# Altium PCB 4 Layer PCB template.PcbDoc
Units mm, origin at the board's own origin, x right, y up, seen from the top; angles counter-clockwise.
Board outline 100 x 100 mm, 4 copper layers (Top, Plane 1, Plane 2, Bottom), stack 1.506 mm thick; 2 components, 0 nets, 4 pads, 0 vias.
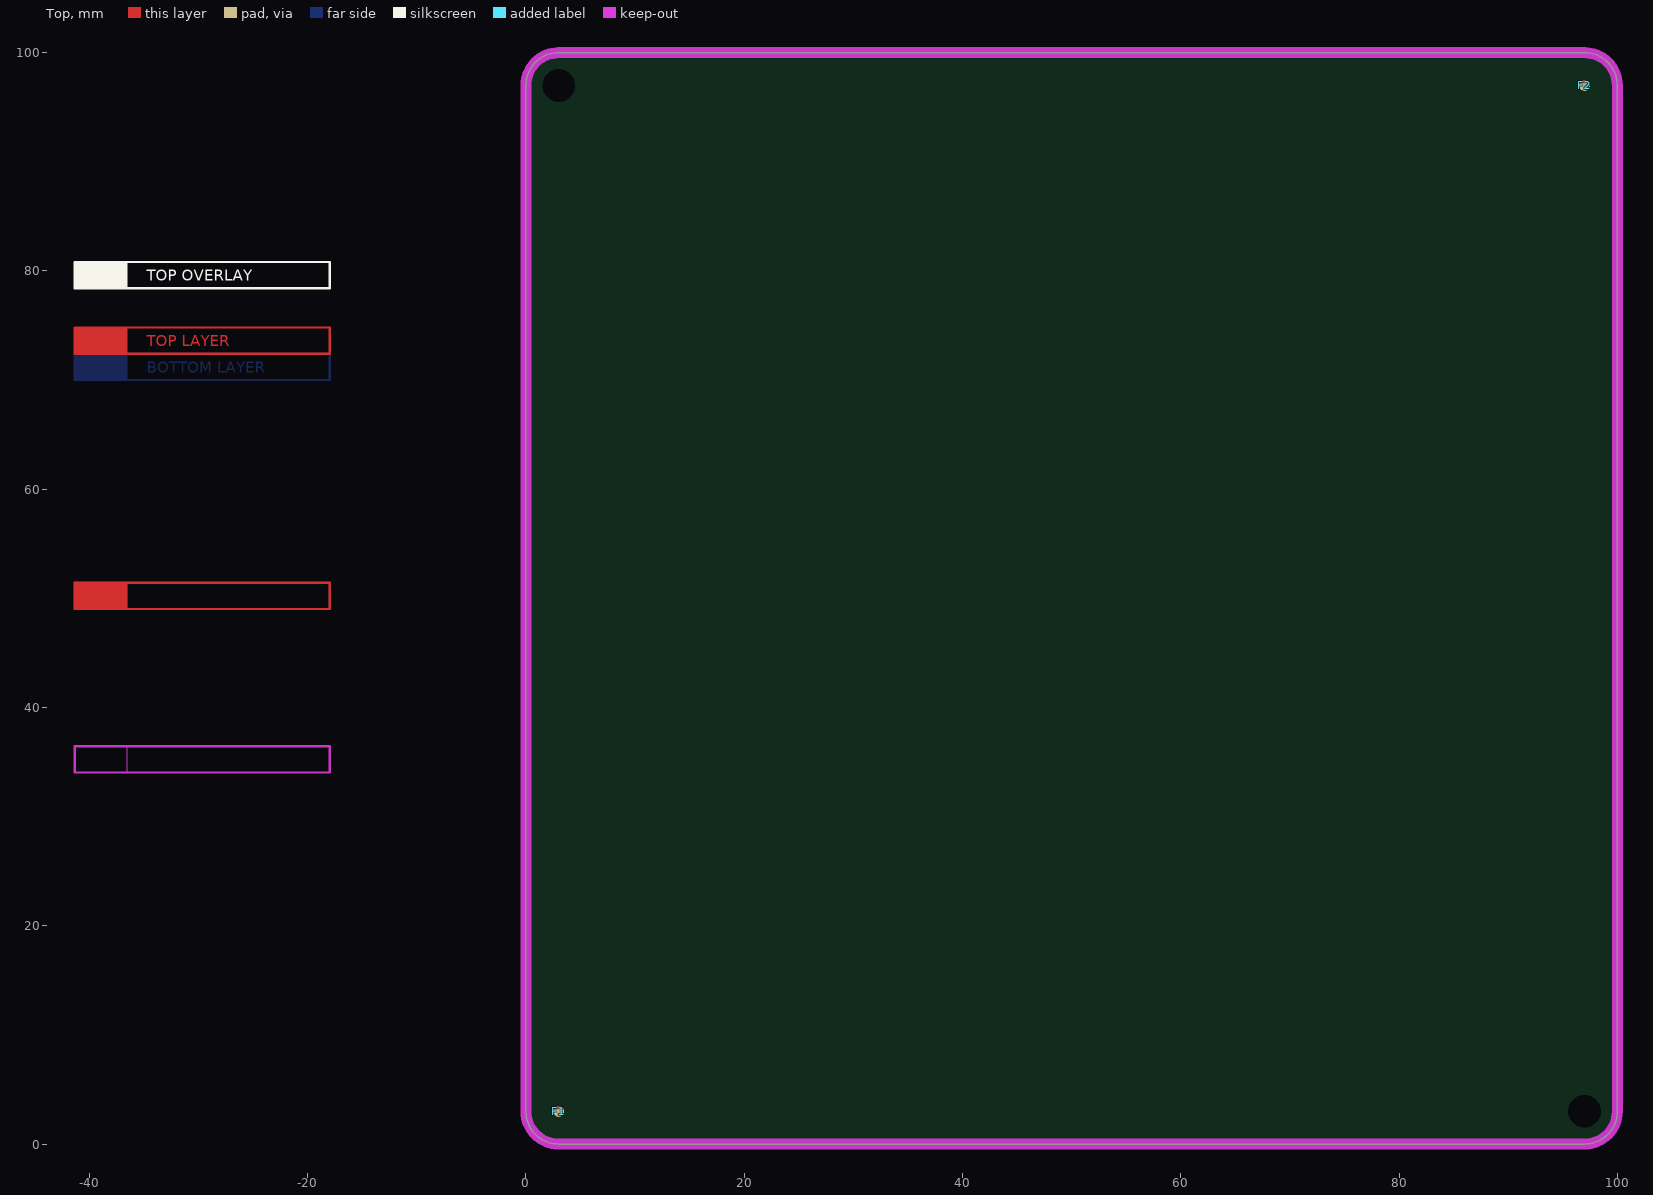
[diagram p0: Top view]
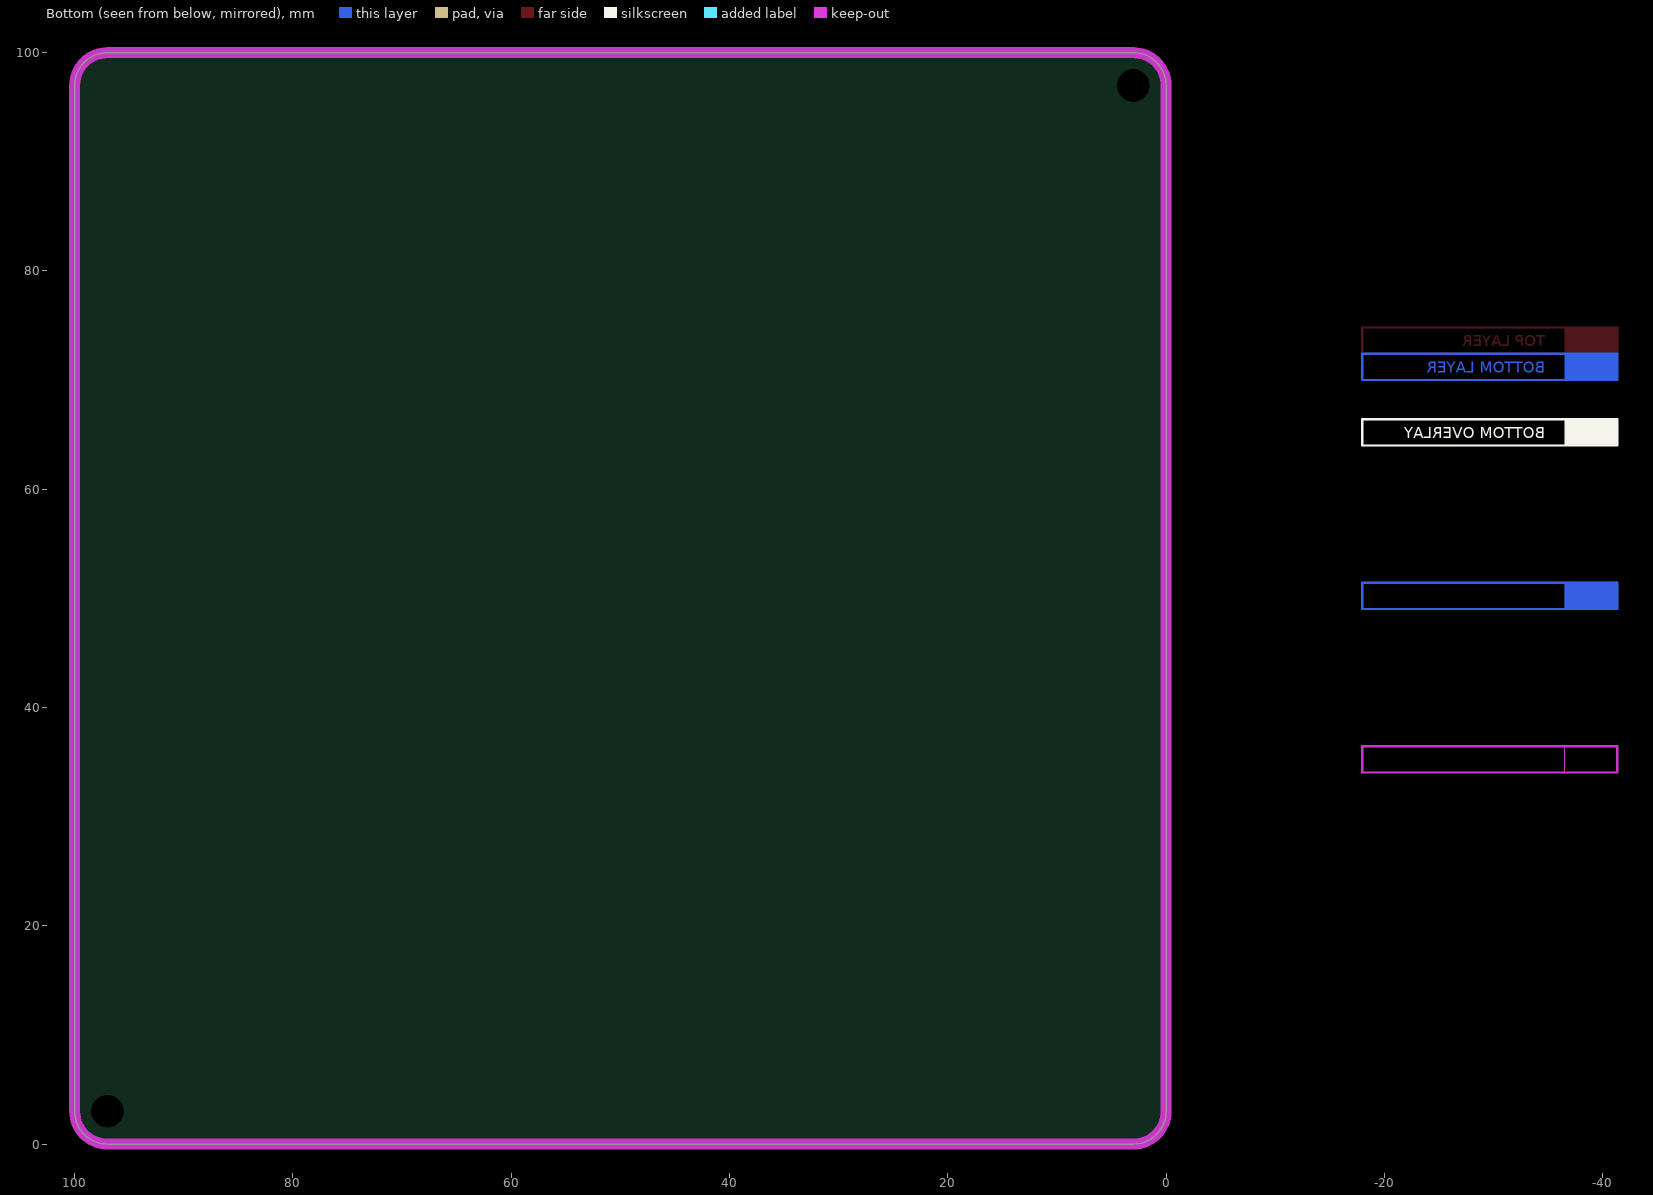
[diagram p1: Bottom view, seen from below]
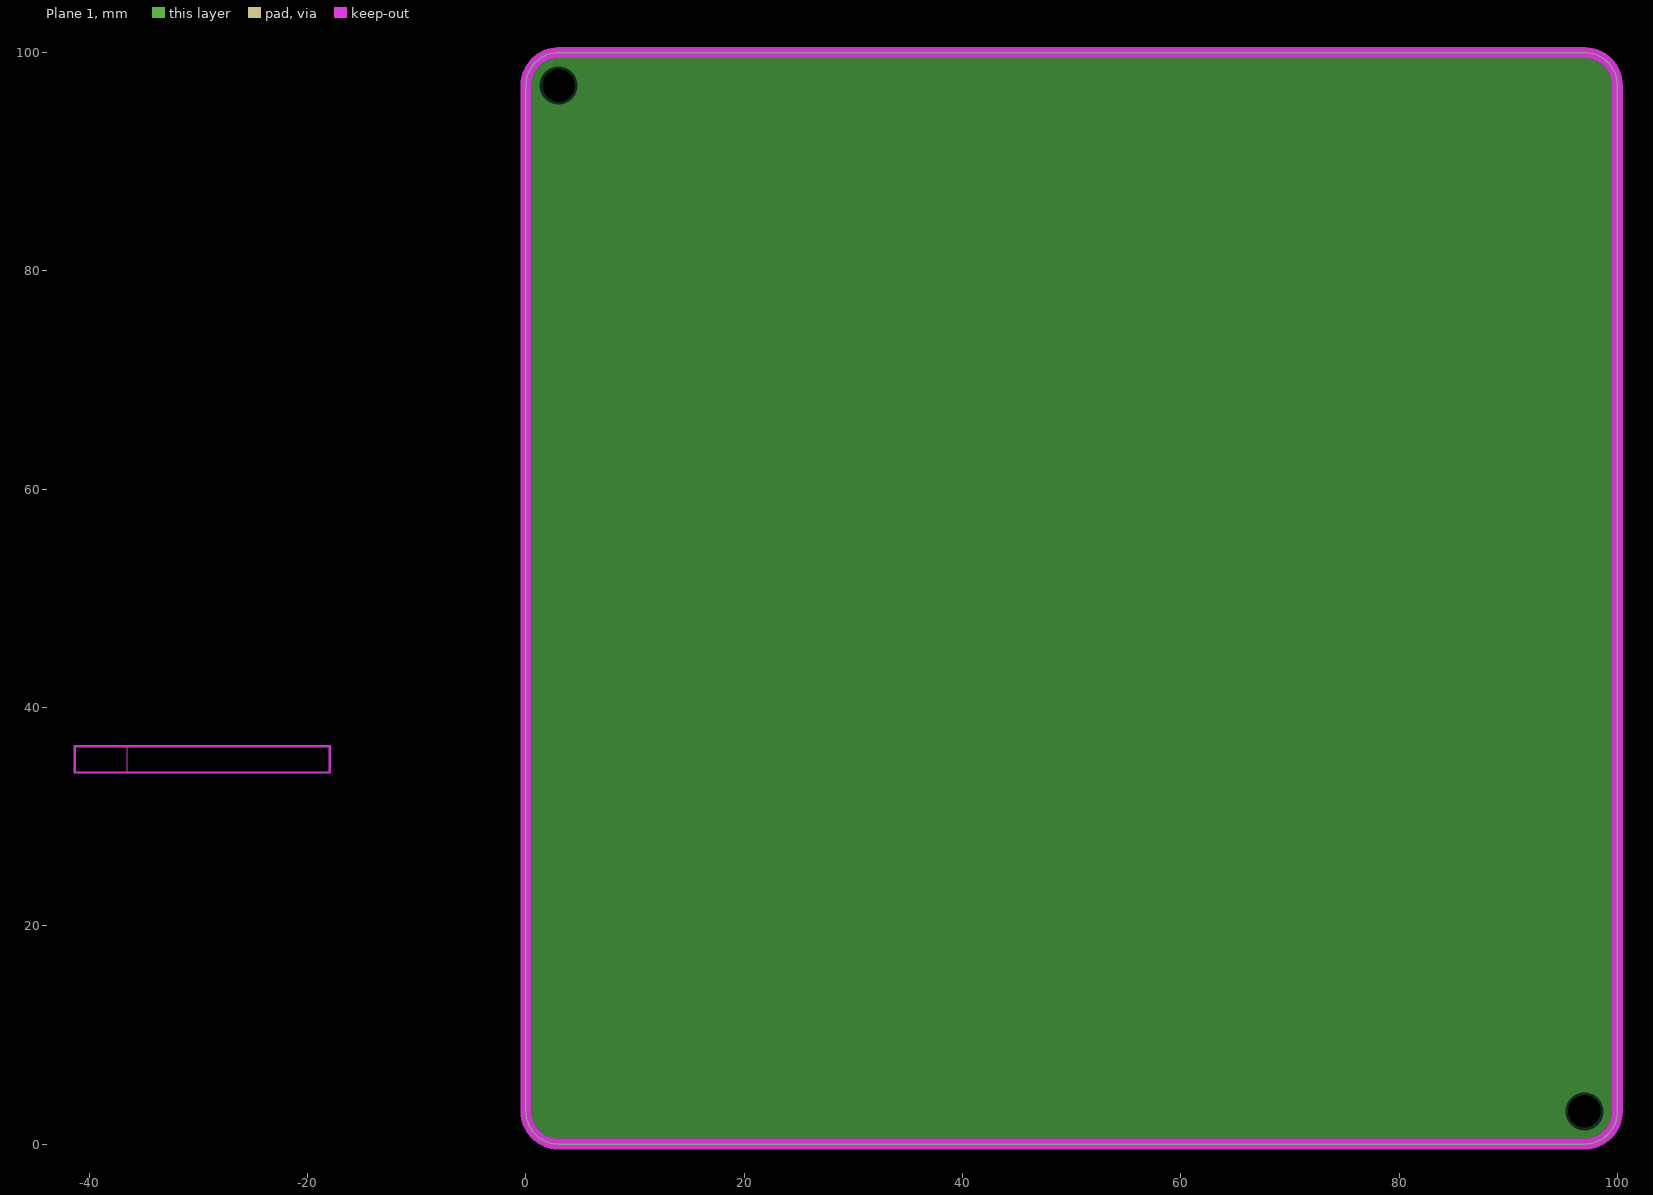
[diagram p2: Plane 1, clearances drawn from the general rule]
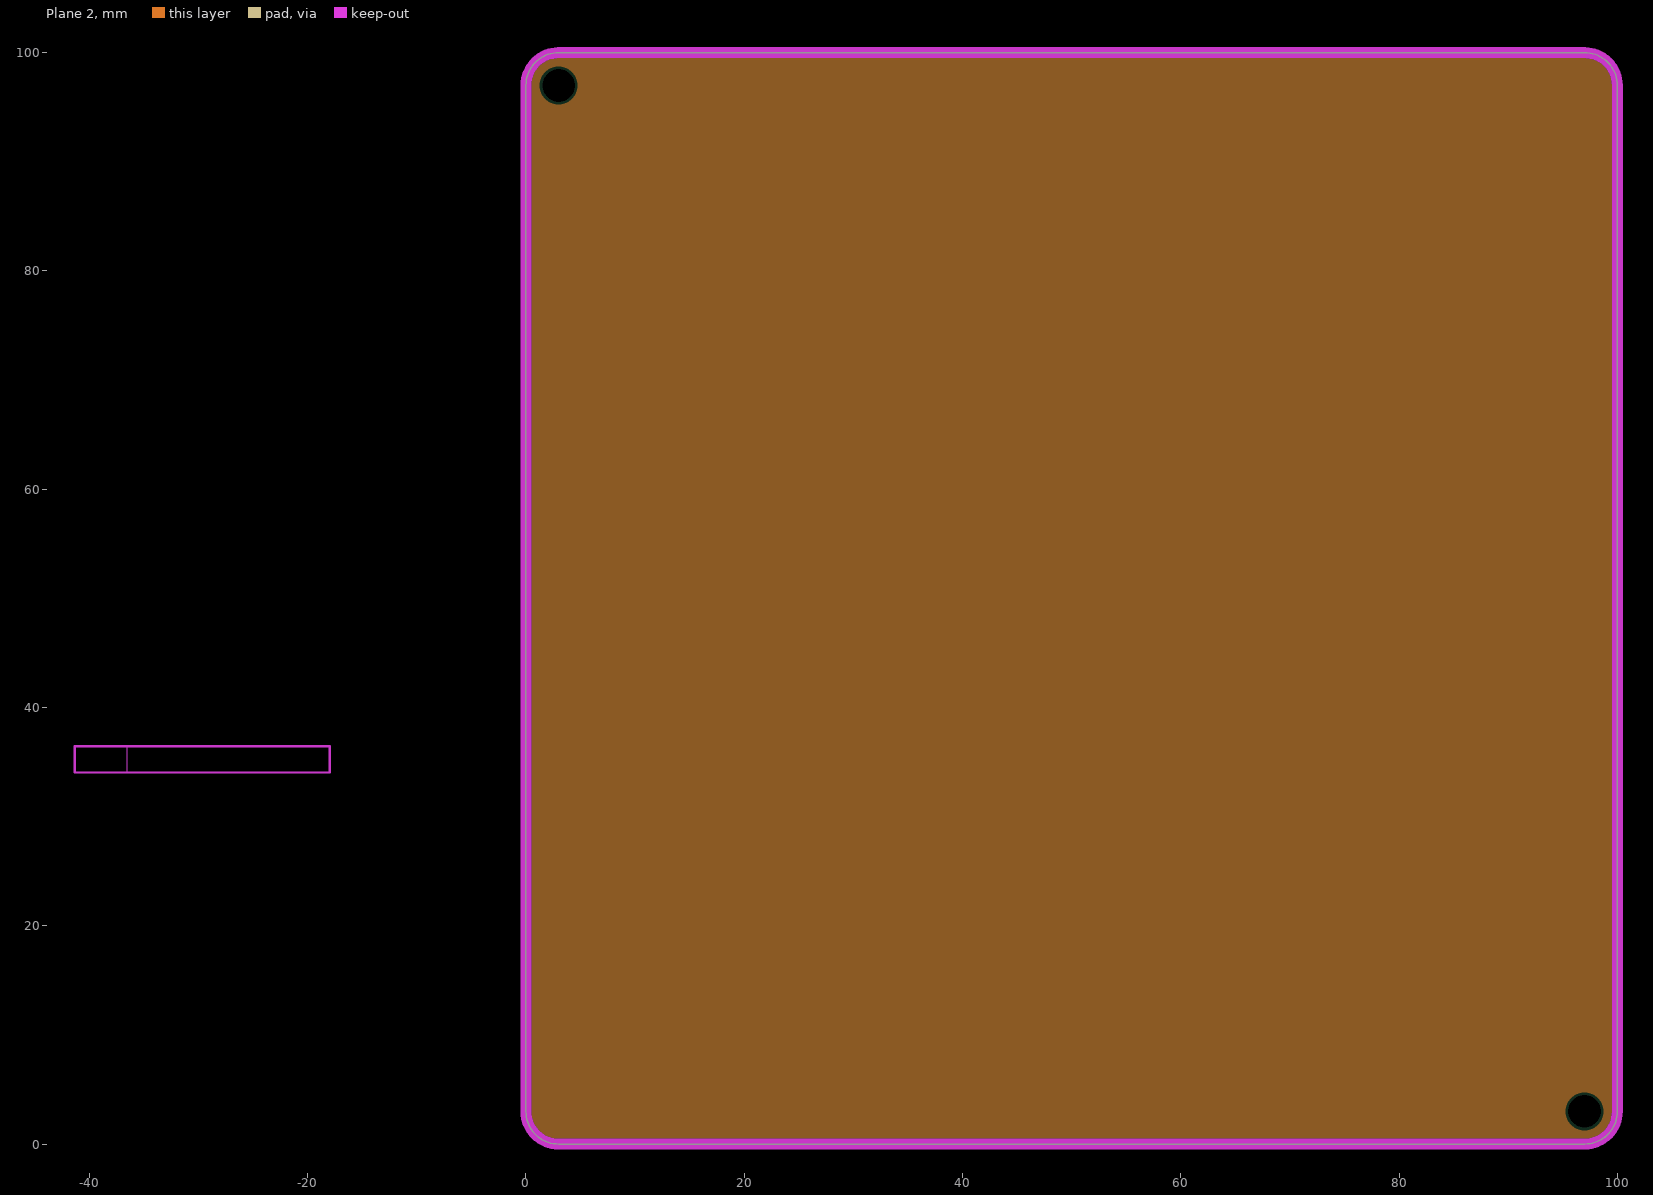
[diagram p3: Plane 2, clearances drawn from the general rule]

## Layer stack, top to bottom
Top: signal copper 0.035
Dielectric: core 0.2, FR-4, Dk 4.58
Plane 1: plane copper 0.018
Dielectric: prepreg 1, FR-4, Dk 4.58
Plane 2: plane copper 0.018
Dielectric: core 0.2, FR-4, Dk 4.58
Bottom: signal copper 0.035

## Board outline
0,3 0,97 cw(c3,97) 3,100 97,100 cw(c97,97) 100,97 100,3 cw(c97,3) 97,0 3,0 cw(c3,3)

## Design rules (kind name [scope] priority, off if disabled: settings)
AssemblyTestPointUsage [All] p1 off:
AssemblyTestpoint [All] p1 off: testpointundercomponent=TRUE minsize=1.016 maxsize=2.54 preferedsize=1.524 minholesize=0 maxholesize=1.016 preferedholesize=0.813 testpointgrid=0.025 usegrid=TRUE gridtolerance=0 allowsidetop=TRUE allowsidebottom=TRUE
Clearance ClearanceViaPad [IsVia vs IsPad] p1: gap=0.1
Clearance ClearanceGNDpolygons [InPolygonClass('GNDpolygons')] p2: gap=0.3
Clearance ClearanceTechnology [All] p3: gap=0.2
FabricationTestPointUsage [All] p1 off: valid=0 allowmultiple=FALSE
FabricationTestpoint [All] p1 off: side=3 testpointundercomponent=TRUE minsize=1.016 maxsize=2.54 preferedsize=1.524 minholesize=0 maxholesize=1.016 preferedholesize=0.813 testpointgrid=0.025 allowsidetop=TRUE allowsidebottom=TRUE usegrid=TRUE gridtolerance=0
HoleSize [All] p1: absolutevalues=TRUE maxlimit=6.3 minlimit=0.3 maxpercent=80.000 minpercent=20.000
HoleToHoleClearance [All] p1: gap=0.3 allowstackedmicrovias=TRUE
MinimumAnnularRing [All] p1: minimumring=0.2
MinimumSolderMaskSliver [All] p1: minsoldermaskwidth=0
PlaneClearance [All] p1: clearance=0.25
PlaneConnect [All] p1: planeconnectstyle=Relief reliefexpansion=0.508 reliefentries=4 reliefconductorwidth=0.254 reliefairgap=0.254
PolygonConnect PolygonConnectVia [IsVia] p1: connectstyle=Direct reliefconductorwidth=0.4 reliefentries=4 polygonreliefangle="90 Angle" airgapwidth=0.254
PolygonConnect PolygonConnectBigPads [(ObjectKind = 'Pad') And ((AsMM(PadXSize_AllLayers) > 2) Or (AsMM(PadYSize_AllLayers) > 2))] p2: connectstyle=Direct reliefconductorwidth=0.4 reliefentries=4 polygonreliefangle="90 Angle" airgapwidth=0.254
PolygonConnect PolygonConnectGeneral [All] p3: connectstyle=Relief reliefconductorwidth=0.3 reliefentries=4 polygonreliefangle="90 Angle" airgapwidth=0.2
RoutingVias [All] p1: holewidth=0.6 width=1.2 viastyle="Through Hole" minholewidth=0.3 minwidth=0.7 maxholewidth=0.9 maxwidth=1.4
SilkToSilkClearance [All] p1: silktosilkclearance=0.15
SilkToSolderMaskClearance SilkscreenOverComponentPads [IsPad] p1: minsilkscreentomaskgap=0.1 clearancetoexposedcopper=FALSE
SolderMaskExpansion [All] p1: expansion=0.1
Width WidthTechnology [All] p1: maxlimit=3 minlimit=0.16 preferedwidth=0.6 minimp=50.000000 maximp=50.000000 favimp=50.000000
17 further rules are at their usual default settings.

## Classes and differential pairs
channel class "Row driver": "U_Row driver 1" "U_Row driver 2" "U_Row driver 3" "U_Row driver 4" "U_Row driver 5" "U_Row driver 6" "U_Row driver 7" "U_Row driver 8"
channel class "Column driver": "U_Column driver 1" "U_Column driver 2" "U_Column driver 3" "U_Column driver 4"

## Components (designator, comment, footprint, x,y, rotation, side; value= is the part's Value field where it differs from the comment)
F1 "Fiducial" FIDUCIAL 3,3 r90 top locked
F2 "Fiducial" FIDUCIAL 97,97 r90 top locked

## Footprints (in the part's own frame and the unit in brackets; to place one, negate y for a bottom-side part, rotate by r counter-clockwise, add the part's x,y. Pads: shape width x height; smd on the part's side, far side on the other; paste and mask are expansions set on the pad)
FIDUCIAL [mm] "Fiducial"
  round 1 smd paste-1 mask+0.5: ""(0,0)
  body extent -0.49,-0.5 0.5,0.5, height 0.5

## Free pads (board coordinates)
  round 1 hole 3: 0(3,97) 0(97,3)

## Nets (pads, with @x,y where several pads share a name; then routed paths per layer and width w, separated by ;. In a path a pad name is that pad's centre, name@x,y a point inside that pad or via, vN(x,y) a via of type N, cw(c..) or ccw(c..) an arc to the next point about the centre after c; other vN are vias at no path point)
pads on no net: F1. F2.
copper on no net: | length 103.1
  Top w0.2: -41.342,72.414 -17.974,72.414 -17.974,74.827 -41.342,74.827 -41.342,72.414
  Bottom w0.2: -41.342,70.001 -17.974,70.001 -17.974,72.414 -41.342,72.414 -41.342,70.001

## Polygon pours and split planes (outlines as drawn)
no net on Plane 1 (split plane): 97.218,99.49 97.434,99.462 97.647,99.415 97.855,99.349 98.056,99.266 98.25,99.165 98.434,99.048 98.607,98.915 98.768,98.768 98.915,98.607 99.048,98.434 99.165,98.25 99.266,98.056 99.349,97.855 99.415,97.647 99.462,97.434 99.49,97.218 99.499,97.016 99.498,97 99.498,3 99.499,2.984 99.49,2.782 99.462,2.566 99.415,2.353 99.349,2.145 99.266,1.944 99.165,1.75 99.048,1.566 98.915,1.393 98.768,1.232 98.607,1.085 98.434,0.952 98.25,0.835 98.056,0.734 97.855,0.651 97.647,0.585 97.434,0.538 97.218,0.51 97.016,0.501 97,0.502 3,0.502 2.984,0.501 2.782,0.51 2.566,0.538 2.353,0.585 2.145,0.651 1.944,0.734 1.75,0.835 1.566,0.952 1.393,1.085 1.232,1.232 1.085,1.393 0.952,1.566 0.835,1.75 0.734,1.944 0.651,2.145 0.585,2.353 0.538,2.566 0.51,2.782 0.501,2.984 0.502,3 0.502,97 0.501,97.016 0.51,97.218 0.538,97.434 0.585,97.647 0.651,97.855 0.734,98.056 0.835,98.25 0.952,98.434 1.085,98.607 1.232,98.768 1.393,98.915 1.566,99.048 1.75,99.165 1.944,99.266 2.145,99.349 2.353,99.415 2.566,99.462 2.782,99.49 2.984,99.499 3,99.498 97,99.498 97.016,99.499
no net on Plane 2 (split plane): 97.218,99.49 97.434,99.462 97.647,99.415 97.855,99.349 98.056,99.266 98.25,99.165 98.434,99.048 98.607,98.915 98.768,98.768 98.915,98.607 99.048,98.434 99.165,98.25 99.266,98.056 99.349,97.855 99.415,97.647 99.462,97.434 99.49,97.218 99.499,97.016 99.498,97 99.498,3 99.499,2.984 99.49,2.782 99.462,2.566 99.415,2.353 99.349,2.145 99.266,1.944 99.165,1.75 99.048,1.566 98.915,1.393 98.768,1.232 98.607,1.085 98.434,0.952 98.25,0.835 98.056,0.734 97.855,0.651 97.647,0.585 97.434,0.538 97.218,0.51 97.016,0.501 97,0.502 3,0.502 2.984,0.501 2.782,0.51 2.566,0.538 2.353,0.585 2.145,0.651 1.944,0.734 1.75,0.835 1.566,0.952 1.393,1.085 1.232,1.232 1.085,1.393 0.952,1.566 0.835,1.75 0.734,1.944 0.651,2.145 0.585,2.353 0.538,2.566 0.51,2.782 0.501,2.984 0.502,3 0.502,97 0.501,97.016 0.51,97.218 0.538,97.434 0.585,97.647 0.651,97.855 0.734,98.056 0.835,98.25 0.952,98.434 1.085,98.607 1.232,98.768 1.393,98.915 1.566,99.048 1.75,99.165 1.944,99.266 2.145,99.349 2.353,99.415 2.566,99.462 2.782,99.49 2.984,99.499 3,99.498 97,99.498 97.016,99.499

## Keep-outs
Keep-Out Layer:
  rectangle: -41.342,34.035 -36.516,36.448
  lines w0.2: -41.342,34.035 -17.974,34.035 -17.974,36.448 -41.342,36.448 -41.342,34.035
  lines w1: 3,100 ccw(c3,97) 0,97 0,3 ccw(c3,3) 3,0 97,0 ccw(c97,3) 100,3 ; 3,100 97,100 ; 3,100 3,100 ; 97,100 cw(c97,97) 100,97 ; 97,100 97,100 ; 100,3 100,3 ; 100,3 100,97 ; 100,97 100,97
  text "ROUTING KEEPOUT LAYER" at -34.738,34.721 h0.89

## Other copper
Top:
  rectangle: -41.342,72.414 -36.516,74.827
  text "TOP LAYER" at -34.738,73.1 h1.02
Bottom:
  rectangle: -41.342,70.001 -36.516,72.414
  text "BOTTOM LAYER" at -34.738,70.687 h1.02
Multi-Layer:
  rectangle: -41.342,49.021 -36.516,51.434
  lines w0.2: -41.342,49.021 -17.974,49.021 -17.974,51.434 -41.342,51.434 -41.342,49.021
  text "MULTILAYER" at -34.738,49.707 h1.02

## Silkscreen, mask and mechanical layers (free items; w line width, h text height)
Top Overlay:
  rectangle: -41.342,78.409 -36.516,80.822
  lines w0.2: -41.342,78.409 -41.342,80.822 -17.974,80.822 -17.974,78.409 -41.342,78.409
  text "TOP OVERLAY" at -34.738,79.094 h1.02
Bottom Overlay:
  rectangle: -41.342,64.007 -36.516,66.42
  lines w0.2: -41.342,64.007 -41.342,66.42 -17.974,66.42 -17.974,64.007 -41.342,64.007
  text "BOTTOM OVERLAY" at -34.738,64.693 h1.02
Top Paste:
  rectangle: -41.342,81.406 -36.516,83.819
  lines w0.2: -41.342,81.406 -17.974,81.406 -17.974,83.819 -41.342,83.819 -41.342,81.406
  text "TOP PASTE" at -34.738,82.092 h1.02
Bottom Paste:
  rectangle: -41.342,61.01 -36.516,63.423
  lines w0.2: -41.342,61.01 -17.974,61.01 -17.974,63.423 -41.342,63.423 -41.342,61.01
  text "BOTTOM PASTE" at -34.738,61.695 h1.02
Top Solder:
  rectangle: -41.342,75.411 -36.516,77.824
  lines w0.2: -41.342,75.411 -41.342,77.824 -17.974,77.824 -17.974,75.411 -41.342,75.411
  text "TOP SOLDER MASK" at -34.738,76.097 h1.02
Bottom Solder:
  rectangle: -41.342,67.004 -36.516,69.417
  lines w0.2: -41.342,67.004 -17.974,67.004 -17.974,69.417 -41.342,69.417 -41.342,67.004
  text "BOTTOM SOLDER MASK" at -34.738,67.69 h1.02
Drill Guide:
  rectangle: -41.342,58.012 -36.516,60.425
  lines w0.2: -41.342,58.012 -41.342,60.425 -17.974,60.425 -17.974,58.012 -41.342,58.012
  text "DRILL GUIDE (SLOTS)" at -34.738,58.698 h1.02
Outline:
  rectangle: -41.342,52.018 -36.516,54.431
  lines w0.1: 0,3 ccw(c3,3) 3,0 97,0 ccw(c97,3) 100,3 100,97 ccw(c97,97) 97,100 3,100 ccw(c3,97) 0,97 0,3
  lines w0.2: -41.342,52.018 -41.342,54.431 -17.974,54.431 -17.974,52.018 -41.342,52.018
  lines w0.25: 123.924,-23.15 253.976,-23.15 ; 123.924,-19.005 253.976,-19.005 ; 122.4,-49.75 ccw(c123.75,-49.75) 123.75,-51.1 254.15,-51.1 ccw(c254.15,-49.75) 255.5,-49.75 255.5,-15.35 ccw(c254.15,-15.35) 254.15,-14 123.75,-14 ccw(c123.75,-15.35) 122.4,-15.35 122.4,-49.75
  lines w0.254: -43.882,117.702 69,117.702 69,112 ; -43.882,122.827 69,122.827 69,117.136 ; -39.056,86.105 -19.498,86.105 ; 33,112 33,117.702 ; 69,122.825 94.975,122.825 ; -43.882,31.825 -15.18,31.825 -15.18,91.693 -43.882,91.693 -43.882,31.825 ; -43.882,112 95,112 95,130.05 -43.882,130.05 -43.882,112
  text ".GlobalProjectName" at -32.125,124.975 h3
  text "Project:" at -42.406,124.816 h1.2
  text ".GlobalProjectTeam" at -34.65,119.3 h2.03
  text ".GlobalProjectLink" at 35.15,119.3 h2.03
  text "Team:" at -42.406,119.225 h1.2
  text "More info:" at 25.35,119.225 h1.2
  text ".GlobalProjectRevision" at 75,114 h7
  text ".Pcb_File_Name_No_Path" at -28,113.934 h2.03
  text "PCB file name:" at -42.406,113.907 h1.2
  text ".GlobalRevisionDate" at 48.119,113.507 h2.03
  text "Rev:" at 71,113.507 h1.2
  text "Revision date:" at 34.944,113.407 h1.2
  text "LAYER USAGE" at -39.056,86.816 h2.03
  text "Fusion service size limits" at 131,77 h5
  text "5cm X 5cm" at 134,72.002 h5
  text "5cm X 10cm" at 134,68.224 h5
  text "5cm X 15cm" at 134,64.446 h5
  text "5cm X 20cm" at 134,60.668 h5
  text "10cm X 10cm" at 134,56.89 h5
  text "10cm X 15cm" at 134,53.112 h5
  text "BOARD OUTLINE" at -34.738,52.704 h1.02
  text "10cm X 20cm" at 134,49.334 h5
  text "15cm X 15cm" at 134,45.556 h5
  text "15cm X 20cm" at 134,41.778 h5
  text "20cm X 20cm" at 134,38 h5
  text "Set Net names for internal plane layers in Design » Layer Stack Manager" at 124,12 h5
  text "Layer Stack Up Detail for: 4 Layer Seed Fusion template.PcbDoc" at 123.924,-17.898 h1.9
  text "Layer" at 123.924,-20.555 h0.95
  text "Gerber" at 151.492,-20.555 h0.95
  text "Copper" at 165.787,-20.555 h0.95
  text "Dielectric" at 181.634,-20.555 h0.95
  text "Dielectric" at 198.146,-20.555 h0.95
  text "Dielectric" at 218.966,-20.555 h0.95
  text "Dielectric" at 235.477,-20.555 h0.95
  text "Name" at 123.924,-22.455 h0.95
  text "Document" at 151.492,-22.455 h0.95
  text "Thickness" at 165.787,-22.455 h0.95
  text "Height" at 181.634,-22.455 h0.95
  text "Material" at 198.146,-22.455 h0.95
  text "Constant" at 218.966,-22.455 h0.95
  text "Type" at 235.477,-22.455 h0.95
  text "Top Solder Mask" at 123.924,-25.207 h1.35
  text "(.GTS)" at 151.492,-25.207 h1.35
  text "0.0102mm" at 181.634,-25.207 h1.35
  text "Solder Resist" at 198.146,-25.207 h1.35
  text "3.50" at 218.966,-25.207 h1.35
  text "Top" at 123.924,-29.072 h1.35
  text "(.GTL)" at 151.492,-29.072 h1.35
  text "0.035mm" at 165.787,-29.072 h1.35
  text "0.2mm" at 181.634,-31.004 h1.35
  text "FR-4" at 198.146,-31.004 h1.35
  text "4.58" at 218.966,-31.004 h1.35
  text "Core" at 235.477,-31.004 h1.35
  text "Plane 1" at 123.924,-32.936 h1.35
  text "(.GP1)" at 151.492,-32.936 h1.35
  text "0.018mm" at 165.787,-32.936 h1.35
  text "1mm" at 181.634,-34.869 h1.35
  text "FR-4" at 198.146,-34.869 h1.35
  text "4.58" at 218.966,-34.869 h1.35
  text "PrePreg" at 235.477,-34.869 h1.35
  text "Plane 2" at 123.924,-36.801 h1.35
  text "(.GP2)" at 151.492,-36.801 h1.35
  text "0.018mm" at 165.787,-36.801 h1.35
  text "0.2mm" at 181.634,-38.733 h1.35
  text "FR-4" at 198.146,-38.733 h1.35
  text "4.58" at 218.966,-38.733 h1.35
  text "Core" at 235.477,-38.733 h1.35
  text "Bottom" at 123.924,-40.666 h1.35
  text "(.GBL)" at 151.492,-40.666 h1.35
  text "0.035mm" at 165.787,-40.666 h1.35
  text "Bottom Solder Mask" at 123.924,-44.53 h1.35
  text "(.GBS)" at 151.492,-44.53 h1.35
  text "0.0102mm" at 181.634,-44.53 h1.35
  text "Solder Resist" at 198.146,-44.53 h1.35
  text "3.50" at 218.966,-44.53 h1.35
Dimensions:
  rectangle: -41.342,37.032 -36.516,39.445
  lines w0.2: -41.146,-10.834 -23.061,-10.834 ; -41.07,-2.782 -22.985,-2.782 ; -41.07,16.369 -22.985,16.369 ; -41.045,8.673 -22.96,8.673 ; -40.918,19.798 -22.833,19.798 ; -41.342,37.032 -41.342,39.445 -17.974,39.445 -17.974,37.032 -41.342,37.032
  lines w0.254: -42.064,-17.8 -17.908,-17.8 -17.908,23.583 -42.064,23.583 -42.064,-17.8
  text "DIMENSIONS" at -34.738,37.718 h1.02
  text "BUILD STATISTICS" at -40.816,20.586 h1.52
  text "GENERAL" at -41.019,16.877 h1.02
  text ".Net_Count" at -31.342,14.769 h1.02
  text "NETS" at -40.943,14.718 h0.89
  text ".Component_Count" at -31.342,12.686 h1.02
  text "COMPONENTS" at -40.918,12.661 h0.89
  text "PRIMITIVES" at -40.994,9.181 h1.02
  text ".Fill_Count" at -31.342,7.048 h1.02
  text "FILLS" at -40.918,7.022 h0.89
  text ".Track_Count" at -31.342,4.99 h1.02
  text "TRACKS" at -40.918,4.939 h0.89
  text ".String_Count" at -31.342,2.907 h1.02
  text "STRINGS" at -40.918,2.857 h0.89
  text ".Arc_Count" at -31.342,0.799 h1.02
  text "ARC'S" at -40.918,0.748 h0.89
  text "LANDS" at -41.019,-2.274 h1.02
  text ".Pad_Count" at -31.342,-4.408 h1.02
  text ".Pad_Count" at -31.342,-4.408 h1.02
  text "PADS" at -40.918,-4.459 h0.89
  text ".Via_Count" at -31.342,-6.491 h1.02
  text "VIA'S" at -40.892,-6.516 h0.89
  text "PRINT SCALE" at -41.095,-10.326 h1.02
  text ".Print_Scale" at -31.393,-12.485 h1.02
  text "SCALE" at -40.968,-12.51 h0.89
  text ".Print_Date" at -31.393,-14.542 h1.02
  text "PRINT DATE" at -40.943,-14.568 h0.89
  text ".Print_Time" at -31.367,-16.6 h1.02
  text "PRINT TIME" at -40.918,-16.625 h0.89
Assembly Top:
  rectangle: -41.342,46.024 -36.516,48.437
  lines w0.2: -41.342,46.024 -17.974,46.024 -17.974,48.437 -41.342,48.437 -41.342,46.024
  text "TOP ASSEMBLY" at -34.738,46.709 h1.02
Assembly Bot:
  rectangle: -41.342,43.026 -36.516,45.439
  lines w0.2: -41.342,43.026 -17.974,43.026 -17.974,45.439 -41.342,45.439 -41.342,43.026
  text "BOTTOM ASSEMBLY" at -34.738,43.712 h1.02
Drill Drawing:
  rectangle: -41.342,55.015 -36.516,57.428
  lines w0.025: -0.319,-43.866 0.316,-43.548 0.951,-43.866 0.633,-43.231 0.951,-42.596 0.316,-42.913 -0.319,-42.596 -0.002,-43.231 -0.319,-43.866
  lines w0.2: -41.342,55.015 -17.974,55.015 -17.974,57.428 -41.342,57.428 -41.342,55.015
  lines w0.381: -2.05,-45.009 96.476,-45.009 ; -2.05,-41.199 96.476,-41.199 ; 11.943,-48.819 11.943,-37.389 ; 29.667,-48.819 29.667,-37.389 ; 63.846,-48.819 63.846,-37.389 ; 76.695,-48.819 76.695,-37.389 ; -2.05,-48.819 96.476,-48.819 96.476,-37.389 -2.05,-37.389 -2.05,-48.819
  text "DRILL DRAWING" at -34.738,55.701 h1.02
  text "Symbol" at 0.236,-40.056 h1.83
  text "Hit Count" at 13.086,-40.056 h1.83
  text "Finished Hole Size" at 30.81,-40.056 h1.83
  text "Plated" at 64.989,-40.056 h1.83
  text "Hole Type" at 77.838,-40.056 h1.83
  text "2" at 13.086,-43.866 h1.52
  text "3.0mm" at 30.81,-43.866 h1.52
  text "PTH" at 64.989,-43.866 h1.52
  text "Round" at 77.838,-43.866 h1.52
  text "2 Total" at 13.086,-47.676 h1.52

## Dimensions
0,3 to 100,3 on Dimensions
97,0 to 97,100 on Dimensions